# EAGLE board omniphone (EAGLE 9.6.2)
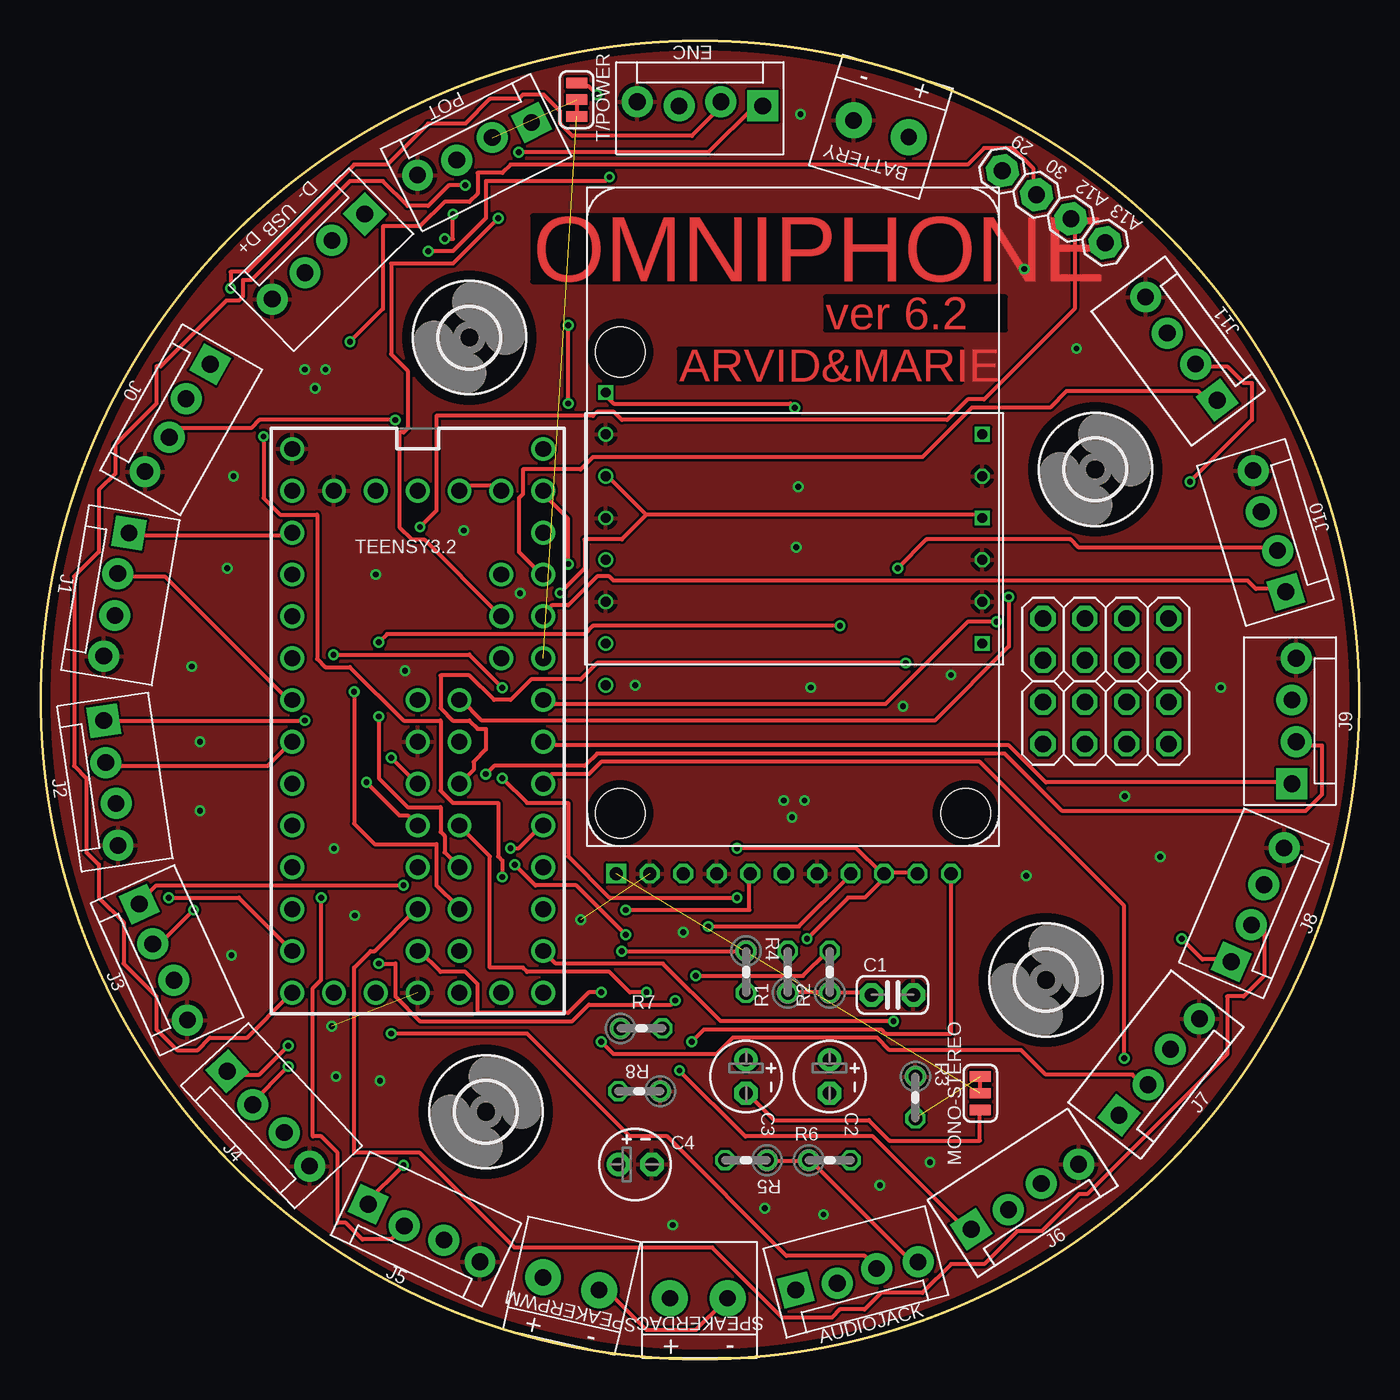
[diagram p0: board, top side]
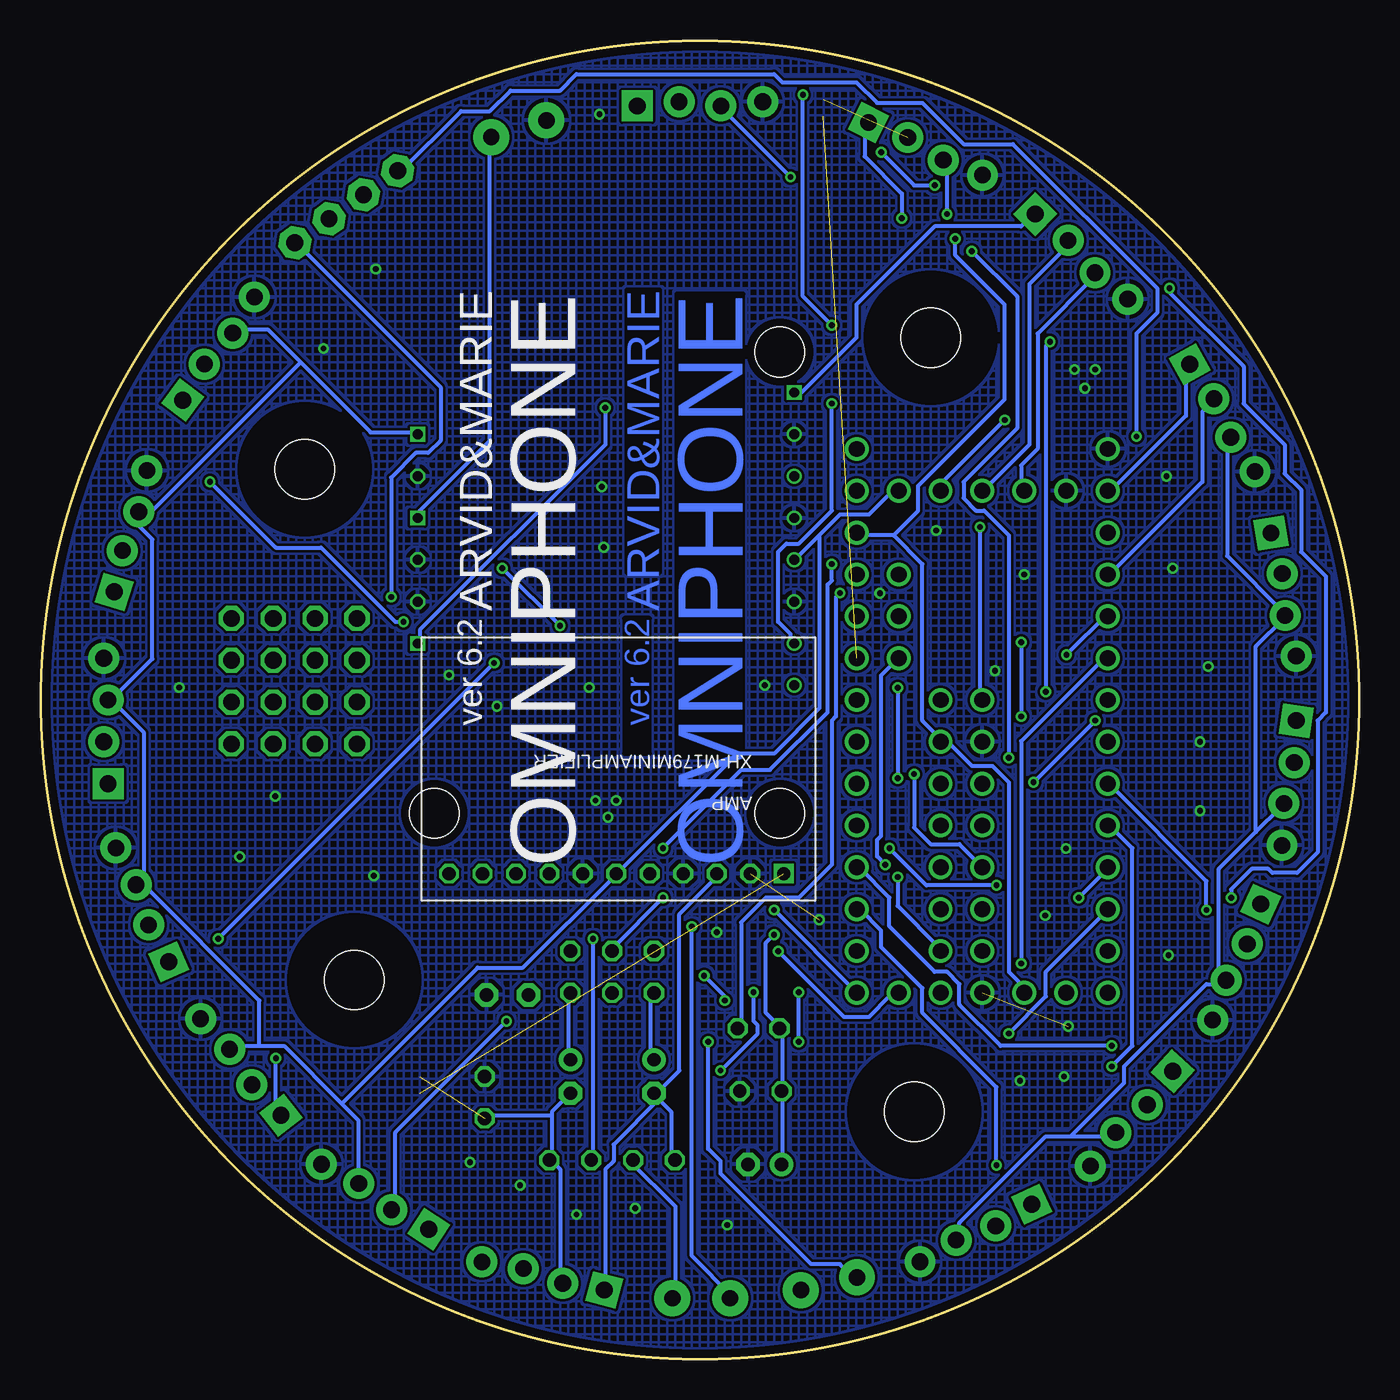
[diagram p1: board, bottom side, seen from below]

Size 80 x 80 mm. Coordinates in mm from the lower left corner, seen from the top.
Outline: circle at 40,40 radius 40
Copper layers (1*16): Top 0.035mm / dielectric 1.6mm / Bottom 0.035mm
Design rules "Elecrow_2-layer_PCB_eagle_rule": minimum track width 6mil, minimum drill 12mil, track to track 6mil, track to pad 6mil, pad to pad 6mil, via to via 8mil, smd to smd 0mil, copper to edge 20mil, drill to drill 10mil, minimum pad ring 6mil, minimum via ring 6mil, stop-mask expansion 0mil, vias tented up to drill 100mil, thermal gap 10mil

## Footprints (pad centres in the part's own frame; a part is rotated, then mirrored left to right if it is on the bottom)
1X01 = drill 1.016 pad 1.93 octagon: 1 0,0
XH-M179AMP = drill 0.8 octagon: 5V 12.065,-1.651; GND 3.937,-1.651; GND1 8.001,-1.651; GND2 14.097,-1.651; L+ 16.129,-1.651; L- 18.161,-1.651; LIN 5.969,-1.651; R+ 22.225,-1.651; R- 20.193,-1.651; SW 10.033,-1.651 | drill 0.8 square: RIN 1.905,-1.651
MOLEX-1X4_LOCK = drill 1.016 pad 1.88 square: 1 0,0.127 | drill 1.016 pad 1.88: 2 2.54,-0.127; 3 5.08,0.127; 4 7.62,-0.127
1X2-3.5MM = drill 1 pad 2.184: + -1.7,0; - 1.8,0
C025-024X044 = drill 0.813 pad 1.422 octagon: 1 -1.27,0; 2 1.27,0
E2-4 = drill 0.813 pad 1.422: + -1.016,0 | drill 0.813 pad 1.422 octagon: - 1.016,0
3,6 = hole 3.6: 0,0
2X04 = drill 1.016 octagon: 1 -3.81,-1.27; 2 -3.81,1.27; 3 -1.27,-1.27; 4 -1.27,1.27; 5 1.27,-1.27; 6 1.27,1.27; 7 3.81,-1.27; 8 3.81,1.27
SMT-JUMPER_3_1-NC_TRACE_SILK = smd 0.635 x 1.27: 1 -1.016,0; 2 0,0; 3 1.016,0
0204V = drill 0.813 octagon: 1 -1.27,0; 2 1.27,0
TEENSY_3.0-3.2_ALL_PINS_&_PADS = drill 0.965: 0 -7.62,13.97; 1 -7.62,11.43; 2 -7.62,8.89; 3 -7.62,6.35; 3.3V 7.62,11.43; 3.3V1 -2.54,-16.51; 3.3V2 2.54,-1.27; 4 -7.62,3.81; 5 -7.62,1.27; 6 -7.62,-1.27; 7 -7.62,-3.81; 8 -7.62,-6.35; 9 -7.62,-8.89; 10 -7.62,-11.43; 11 -7.62,-13.97; 12 -7.62,-16.51; 13 7.62,-16.51; 14/A0 7.62,-13.97; 15/A1 7.62,-11.43; 16/A2 7.62,-8.89; 17/A3 7.62,-6.35; 18/A4 7.62,-3.81; 19/A5 7.62,-1.27; 20/A6 7.62,1.27; 21/A7 7.62,3.81; 22/A8 7.62,6.35; 23/A9 7.62,8.89; 24 0,-3.81; 25 0,-6.35; 26 0,-8.89; 27 0,-11.43; 28 0,-13.97; 29 2.54,-13.97; 30 2.54,-11.43; 31 2.54,-8.89; 32 2.54,-6.35; 33 2.54,-3.81; A10 5.08,6.35; A11 5.08,3.81; A12 0,1.27; A13 2.54,1.27; AGND 7.62,13.97; AREF 5.08,8.89; D+ -2.54,13.97; D- 0,13.97; GND -7.62,16.51; GND1 0,-16.51; GND2 0,-1.27; GND3 -5.08,13.97; PGM 2.54,-16.51; RESET/DAC 5.08,-16.51; VBAT -5.08,-16.51; VIN 7.62,16.51; VUSB 5.08,13.97; VUSB1 2.54,13.97
CHARGECONTROLLERDOUBLE = drill 0.6: 3V3 -22.86,-15.24; 5VOUT1 -22.86,-7.62; BAT1 -22.86,-2.54; EN -22.86,-12.7; GND3 -22.86,0; GND4 -22.86,-5.08; GND5 -22.86,-10.16 | drill 0.6 square: 5VOUT 0,0; BAT 0,-5.08; VIN 0,-12.7; VIN1 -22.86,2.54 | drill 0.6 octagon: GND0 0,-2.54; GND1 0,-7.62; GND2 0,-10.16 | hole 3: -22,-23; -1,-23; -22,5

## Placement (x,y rotation side)
29  [1X01]  58.36,72.13 145 top
30  [1X01]  60.44,70.67 145 top
A12  [1X01]  62.52,69.22 145 top
A13  [1X01]  64.6,67.76 145 top
AMP  XH-M179MINIAMPLIFIER  [XH-M179AMP]  33.02,27.81 180 bottom
AUDIOJACK  [MOLEX-1X4_LOCK]  45.84,4.06 14.8 top
BATTERY  SPEAKERTERMINAL-3.5MM  [1X2-3.5MM]  51.05,74.67 163 top
C1  0.01uF  [C025-024X044]  51.68,22.09 0 top
C2  10uF  [E2-4]  47.87,17.14 270 top
C3  10uF  [E2-4]  42.79,17.14 270 top
C4  0.1uF  [E2-4]  36.06,11.81 0 top
ENC  [MOLEX-1X4_LOCK]  43.81,76.19 180 top
H1  MOUNT-HOLE3.6  [3,6]  27,15 0 top
H2  MOUNT-HOLE3.6  [3,6]  61,23 0 top
H3  MOUNT-HOLE3.6  [3,6]  64,54 0 top
H4  MOUNT-HOLE3.6  [3,6]  26,62 0 top
J0  [MOLEX-1X4_LOCK]  10.16,60.45 240.6 top
J1  [MOLEX-1X4_LOCK]  5.2,50.16 260.4 top
J2  [MOLEX-1X4_LOCK]  3.68,38.73 278.4 top
J3  [MOLEX-1X4_LOCK]  5.84,27.55 294.5 top
J4  [MOLEX-1X4_LOCK]  11.21,17.38 312.8 top
J5  [MOLEX-1X4_LOCK]  19.81,9.27 334.7 top
J6  [MOLEX-1X4_LOCK]  56.53,7.76 33.1 top
J7  [MOLEX-1X4_LOCK]  65.54,14.71 52.1 top
J8  [MOLEX-1X4_LOCK]  72.37,24.06 67 top
J9  [MOLEX-1X4_LOCK]  76.07,34.92 90 top
J10  [MOLEX-1X4_LOCK]  75.69,46.6 107 top
J11  [MOLEX-1X4_LOCK]  71.5,58.28 126.7 top
JP1  PINHD-2X4  [2X04]  64.64,43.68 0 top
JP2  PINHD-2X4  [2X04]  64.64,38.6 0 top
MONO-STEREO  JUMPER-SMT_3_1-NC_TRACE_SILK  [SMT-JUMPER_3_1-NC_TRACE_SILK]  57.02,16.12 90 top
POT  [MOLEX-1X4_LOCK]  29.71,75.18 206.7 top
R1  475R  [0204V]  45.33,23.49 90 top
R2  127K  [0204V]  47.87,23.49 90 top
R3  100k  [0204V]  53.08,15.87 270 top
R4  47-100R  [0204V]  42.79,23.49 270 top
R5  10k  [0204V]  42.79,12.06 180 top
R6  10k  [0204V]  47.87,12.06 0 top
R7  200K  [0204V]  36.44,20.06 0 top
R8  70K  [0204V]  36.32,16.25 180 top
SPEAKERDAC  SPEAKERTERMINAL-3.5MM  [1X2-3.5MM]  39.87,3.68 0 top
SPEAKERPWM  SPEAKERTERMINAL-3.5MM  [1X2-3.5MM]  32.13,4.57 347.2 top
T/POWER  JUMPER-SMT_3_1-NC_TRACE_SILK  [SMT-JUMPER_3_1-NC_TRACE_SILK]  32.51,76.45 270 top
TEENSY3.2  TEENSY_3.1-3.2_ALL_PINS&PADS  [TEENSY_3.0-3.2_ALL_PINS_&_PADS]  22.86,38.73 0 top
U$3  CHARGECONTROLLERDOUBLE  [CHARGECONTROLLERDOUBLE]  57.14,56.13 0 top
USB  [MOLEX-1X4_LOCK]  19.55,69.59 224.5 top

## Library data of the parts
29 30 A12 A13 C1-C4 R1-R8 = adafruit
AMP BATTERY SPEAKERDAC SPEAKERPWM TEENSY3.2 U$3 = ArvidLibrary
AUDIOJACK ENC J0 J1-J11 POT USB = SparkFun-Connectors; PROD_ID: CONN-08186; SF_ID: PRT-08231
H1-H4 = holes
JP1 JP2 = Connector; CATEGORY: CONNECTOR; SUB-CATEGORY: PIN-HEADER
MONO-STEREO T/POWER = SparkFun-Jumpers

## Nets
3.3V: POT.3 TEENSY3.2.3.3V TEENSY3.2.3.3V1 TEENSY3.2.3.3V2
5V: AMP.5V J0.3 J1.3 J2.3 J3.3 J4.3 J5.3 J6.3 J7.3 J8.3 J9.3 J10.3 J11.3 TEENSY3.2.VUSB TEENSY3.2.VUSB1 U$3.5VOUT U$3.5VOUT1
AGND: AMP.L- AMP.R- AUDIOJACK.4 R5.1 R6.1 SPEAKERDAC.- SPEAKERPWM.- TEENSY3.2.AGND
AMPSWITCH: AMP.SW TEENSY3.2.13
AREF: TEENSY3.2.AREF
AUDIODAC: AMP.LIN AUDIOJACK.1 C3.- MONO-STEREO.1 R5.2
AUDIOPWM: AUDIOJACK.2 C2.- MONO-STEREO.3 R3.2 R6.2
BAT: BATTERY.+ R7.2 U$3.BAT U$3.BAT1
BATSENSOR: C4.+ R7.1 R8.2 TEENSY3.2.A11
D+: TEENSY3.2.D+ USB.3
D-: TEENSY3.2.D- USB.2
ENC0: ENC.1 TEENSY3.2.12
ENC1: ENC.2 TEENSY3.2.11
ENCSWITCH: ENC.3 TEENSY3.2.24
GND: AMP.GND AMP.GND1 AMP.GND2 BATTERY.- C1.2 C4.- ENC.4 J0.4 J1.4 J2.4 J3.4 J4.4 J5.4 J6.4 J7.4 J8.4 J9.4 J10.4 J11.4 POT.4 R3.1 R8.1 TEENSY3.2.GND TEENSY3.2.GND1 TEENSY3.2.GND2 TEENSY3.2.GND3 U$3.GND0 U$3.GND1 U$3.GND2 U$3.GND3 U$3.GND4 U$3.GND5 USB.4
JACKSENSOR: AUDIOJACK.3 TEENSY3.2.10
L+: AMP.L+ SPEAKERDAC.+
LED0: J0.2 TEENSY3.2.2
LED1: J1.2 TEENSY3.2.5
LED2: J2.2 TEENSY3.2.6
LED3: J3.2 TEENSY3.2.7
LED4: J4.2 TEENSY3.2.8
LED5: J5.2 TEENSY3.2.9
LED6: J6.2 TEENSY3.2.14/A0
LED7: J7.2 TEENSY3.2.28
LED8: J8.2 TEENSY3.2.27
LED9: J9.2 TEENSY3.2.26
LED10: J10.2 TEENSY3.2.31
LED11: J11.2 TEENSY3.2.20/A6
N$1: C1.1 C2.+ R1.1 R2.1
N$2: A13.1 TEENSY3.2.A13
N$3: A12.1 TEENSY3.2.A12
N$4: POT.2 T/POWER.2
N$5: R4.1 TEENSY3.2.RESET/DAC
N$6: 30.1 TEENSY3.2.30
N$7: C3.+ R4.2
N$8: 29.1 TEENSY3.2.29
POT: POT.1 TEENSY3.2.A10
POTSWITCH: T/POWER.3 TEENSY3.2.21/A7
POWERENABLE: T/POWER.1 U$3.EN
PWMAUDIO0: R2.2 TEENSY3.2.4
PWMAUDIO1: R1.2 TEENSY3.2.3
R+: AMP.R+ SPEAKERPWM.+
RIN: AMP.RIN MONO-STEREO.2
TOUCH0: J0.1 TEENSY3.2.0
TOUCH1: J1.1 TEENSY3.2.1
TOUCH2: J2.1 TEENSY3.2.25
TOUCH3: J3.1 TEENSY3.2.17/A3
TOUCH4: J4.1 TEENSY3.2.16/A2
TOUCH5: J5.1 TEENSY3.2.15/A1
TOUCH6: J6.1 TEENSY3.2.32
TOUCH7: J7.1 TEENSY3.2.18/A4
TOUCH8: J8.1 TEENSY3.2.33
TOUCH9: J9.1 TEENSY3.2.19/A5
TOUCH10: J10.1 TEENSY3.2.22/A8
TOUCH11: J11.1 TEENSY3.2.23/A9
VBAT: TEENSY3.2.VBAT
VIN: TEENSY3.2.VIN
VUSBIN: U$3.VIN U$3.VIN1 USB.1

## Tracks (layer width: path | path; a pad name or v marks a point on that pad's centre or on a via)
3.3V  (via drill 0.35)
  Top 0.254: v25,69.5 25,68 v24.5,68
  Bottom 0.254: TEENSY3.2.3.3V1 20.5,22.25 20.5,22.75 21.25,23.5 21.25,35 22.25,36 23.5,36 24.75,37.25 25.25,37.25 TEENSY3.2.3.3V2 25.25,37.5 26.5,38.75 26.5,48.25 28.25,50 | 28.25,50 30.25,50 TEENSY3.2.3.3V | v25,69.5 25,72.75 POT.3 | v24.5,68 24.5,67 21.5,64 21.5,58.25 26.75,53 26.75,51.5 28.25,50
5V  (via drill 0.35)
  Top 0.254: TEENSY3.2.VUSB1 25.5,52.75 25.75,53 27.5,53 27.75,52.75 TEENSY3.2.VUSB | v21.5,57 13.25,57 12.75,56.5 8.5,56.5 8,56 J0.3
  Bottom 0.254: J0.3 8,55.75 8,48.75 4.5,45.25 J1.3 4.5,45 6.25,43.25 6.25,32 | 17.5,13.5 19,13.5 24.25,8.25 24.25,7.25 J5.3 | 17.5,13.5 15,13.5 J4.3 | 8.5,22.75 9.25,22.75 14.25,17.75 14.25,16.75 17.5,13.5 | 8.5,22.75 8.25,22.75 J3.3 8.5,22.75 | 6.25,32 8.5,29.75 8.5,22.75 | 6.25,32 4.75,33.5 J2.3 | 32.75,50 31.5,51.25 29.75,51.25 28.5,52.5 28,52.5 TEENSY3.2.VUSB | 32.75,50 34,48.75 34.25,48.75 U$3.5VOUT1 | 32.75,50 32.75,39.5 35.5,36.75 37.75,36.75 45,29.5 AMP.5V 45.25,29.25 50.75,23.75 53.5,23.75 61.75,15.5 | 64.25,60.5 66.25,62.5 68.25,62.5 J11.3 | 64.25,60.5 60,56.25 57.25,56.25 U$3.5VOUT | 64.25,60.5 73.25,51.5 74,51.5 J10.3 74,51.25 74,50.5 73.25,49.75 73.25,42.5 75.75,40 | 61.75,15.5 65.25,19 66.75,19 | 61.75,15.5 60.75,14.5 60.75,10.75 J6.3 | 66.75,19 68.5,19 J7.3 | 73.75,28.75 74,28.75 J8.3 73.75,28.75 | 73.75,28.75 66.75,21.75 66.75,19 | 75.75,40 73.75,38 73.75,28.75 | 75.75,40 J9.3 | v21.5,57 25.25,53.25 25.25,52.75 TEENSY3.2.VUSB1
AGND  (via drill 0.35)
  Top 0.254: SPEAKERDAC.- 41.5,3.5 39.75,1.75 36.75,1.75 34.5,4 34,4 SPEAKERPWM.- | R5.1 44.25,12 46.5,12 R6.1 46.75,12 52.75,6 53,6 AUDIOJACK.4 | AMP.L- 51.25,29.5 53,29.5 AMP.R- | v32,48.25 32,51 30.5,52.5 TEENSY3.2.AGND | v42.25,31 49.5,31 51,29.5 AMP.L- | v46.5,25.5 49,28 50,28 51.25,29.25 AMP.L-
  Bottom 0.254: SPEAKERDAC.- 41.5,3.75 41.5,9.25 44.25,12 R5.1 | v32,48.25 32,47.25 32.25,47 32.25,39.25 35.75,35.75 37.5,35.75 v42.25,31 | v46.5,25.5 46.5,12.25 R6.1
AMPSWITCH  (via drill 0.35)
  Top 0.254: v35.5,27.25 43,27.25 43,29.25 AMP.SW
  Bottom 0.254: v35.5,27.25 30.5,22.25 TEENSY3.2.13
AUDIODAC
  Top 0.254: MONO-STEREO.1 57,15 57,13.25 51.5,13.25 50.25,14.5 44.5,14.5 43,16 C3.-
  Bottom 0.254: 42.75,16 41.25,17.5 41.25,27 39,29.25 AMP.LIN | 42.75,16 42.5,15.75 | 42.5,15.75 41.75,15 41.75,12.25 R5.2 | 42.75,16 C3.- 42.5,15.75 | 42.5,15.75 45.25,13 45.25,12 45.75,11.5 45.75,4.25 AUDIOJACK.1
AUDIOPWM  (1 unrouted)
  Bottom 0.254: 49,14.75 49,15 48,16 C2.- | 49,14.75 49,12.25 R6.2 49,12 48.5,11.5 48.5,4.75 AUDIOJACK.2 | 49,14.75 53,14.75 R3.2
BAT  (via drill 0.35)
  Top 0.254: 36.75,51.25 34.5,53.5 U$3.BAT1 | 36.75,51.25 57,51.25 U$3.BAT | v31.5,46.5 33,48 33,49.75 35.25,49.75 36.75,51.25
  Bottom 0.254: v31.5,46.5 31.75,46.25 31.75,39 32,38.75 32,30 34,28 36,28 37.5,26.5 37.5,20.25 R7.2 | BATTERY.+ 52.75,74 52.75,55.75 57.25,51.25 U$3.BAT
BATSENSOR  (via drill 0.35)
  Top 0.254: v28.75,30 30,28.75 32.5,28.75 v35.5,25.75
  Bottom 0.254: C4.+ 35,12 35,16.25 R8.2 35,16.5 35,20 R7.1 35.25,20.25 36,21 36,25.25 v35.5,25.75 | v28.75,30 29.25,30.5 29.25,31.5 29,31.75 29,41.5 28,42.5 TEENSY3.2.A11
D+
  Bottom 0.254: TEENSY3.2.D+ 20.5,52.75 20.5,54.25 19.5,55.25 19.5,62.25 16,65.75 USB.3
D-
  Bottom 0.254: TEENSY3.2.D- 22.75,52.75 20,55.5 20,65.25 17.5,67.75 USB.2
ENC0  (via drill 0.35)
  Top 0.254: v25.75,71.25 24.75,71.25 23.5,70 22.25,70 20.75,71.5 18.75,71.5 12.75,65.5 12.25,65.5 12.25,64.5 12,64.25 11.25,64.25 7.25,60.25 7,60.25 7,58 4.5,55.5 4.5,53.75 3.5,52.75 3.5,49 2,47.5 2,36 2.75,35.25 2.75,30.75 3.5,30 3.5,28 5,26.5 5,24 7,22 7,20 8.25,18.75 9.5,18.75 10.25,19.5 12.5,19.5 15,22 TEENSY3.2.12 | v29,73.25 40.5,73.25 43.25,76 43.75,76 ENC.1
  Bottom 0.254: v25.75,71.25 27,71.25 v29,73.25
ENC1  (via drill 0.35)
  Top 0.254: v7.75,28 12,28 15,25 TEENSY3.2.11 | v11.5,65 11.5,66 12.5,66 19,72.5 21,72.5 23.5,75 25.75,75 27.25,76.5 29,76.5 29.25,76.75 30.5,76.75 31.5,75.75 31.5,75 32.25,74.25 39.5,74.25 41.5,76.25 ENC.2
  Bottom 0.254: v7.75,28 7.75,28.5 6.5,29.75 5.5,29.75 5.25,29.5 3.75,29.5 2.5,30.75 2.5,38.75 2,39.25 2,47.5 3.5,49 3.5,52.75 4.5,53.75 4.5,55.5 7,58 7,60.25 11.5,64.75 v11.5,65
ENCSWITCH  (via drill 0.35)
  Top 0.254: v21.25,36.5 22.75,35 TEENSY3.2.24 | v23.5,67.25 25,67.25 27,69.25 27,71.5 34.25,71.5 v34.5,71.75
  Bottom 0.254: v21.25,36.5 21.25,50 22.75,51.5 23.25,51.5 24,52.25 24,53.25 20.75,56.5 20.75,64.5 v23.5,67.25 | v34.5,71.75 38.75,76 ENC.3
GND  (via drill 0.35)  (2 unrouted)
  other vias: 16.63,58.92 16,60.07 17.27,60.07 20.32,47.62 25.65,50.29 29.08,46.48 36.06,40.89 46.73,40.76 45.08,33.9 46.35,33.9 45.59,32.89 65.78,34.16 67.94,30.48 59.81,29.33 71.62,40.76 17.9,17.14 20.57,16.89 17.65,20.19 19.05,26.92 17.77,30.98 9.65,33.27 11.55,24.51 38.98,25.9 32.76,26.66 22.09,41.78 9.65,37.46 9.14,42.03 11.3,48 11.68,53.59 46.1,75.56 59.69,66.16 62.86,61.34 45.97,52.95 45.84,49.27 55.24,41.52 52.32,39.62 53.97,11.93 50.92,10.54 47.49,8.76 43.94,9.14 38.35,8.12
  pour Top: 40,83.18 60.32,83.18 83.18,60.32 83.18,22.22 57.78,-3.18 22.22,-3.18 -5.72,24.76 -5.72,57.78 17.14,80.64 19.68,83.18
  pour Bottom (hatched): 40,83.18 19.68,83.18 -3.18,60.32 -3.18,22.22 22.22,-3.18 57.78,-3.18 85.72,24.76 85.72,57.78 62.86,80.64 60.32,83.18
JACKSENSOR  (via drill 0.35)
  Top 0.254: v21.25,19.75 29.5,19.75 35.75,13.5 38,13.5 45.25,6.25 50,6.25 50.75,5.5 AUDIOJACK.3
  Bottom 0.254: v21.25,19.75 19,22 19,23.5 15.25,27.25 TEENSY3.2.10
L+  (via drill 0.35)
  Top 0.254: v40.5,26.25 46,26.25 49,29.25 AMP.L+
  Bottom 0.254: v40.5,26.25 40.5,6.25 38,3.75 SPEAKERDAC.+
LED0
  Bottom 0.254: TEENSY3.2.2 15,47.75 9.5,53.25 9.5,57.5 8.75,58.25 J0.2
LED1
  Top 0.254: TEENSY3.2.5 15,40 7.5,47.5 4.75,47.5 J1.2
LED2
  Top 0.254: TEENSY3.2.6 15,37.25 13.75,36 4,36 J2.2
LED3  (via drill 0.35)
  Top 0.254: v9.25,27.25 7.25,25.25 7,25.25 J3.2
  Bottom 0.254: v9.25,27.25 9.25,29 15,34.75 TEENSY3.2.7
LED4  (via drill 0.35)
  Top 0.254: v15,17.75 12.75,15.5 J4.2
  Bottom 0.254: v15,17.75 13.75,19 13.75,31 15,32.25 TEENSY3.2.8
LED5  (via drill 0.35)
  Top 0.254: v17,28 17,23 16.5,22.5 16.5,13.5 17,13.5 18,12.5 18,8.25 18.5,8.25 19.5,7.25 21.25,7.25 22,8 J5.2
  Bottom 0.254: v17,28 15.25,29.75 TEENSY3.2.9
LED6  (via drill 0.35)
  Top 0.254: v51.75,20.5 41.25,20.5 37.75,24 31.25,24 30.5,24.75 TEENSY3.2.14/A0
  Bottom 0.254: v51.75,20.5 58.5,13.75 58.5,9.25 J6.2
LED7  (via drill 0.35)
  Top 0.254: v34,22.25 33.25,22.25 32,21 26.5,21 26.5,22.75 25.75,23.5 24.25,23.5 23,24.75 TEENSY3.2.28 | v34,19.25 34.75,18.5 41,18.5 42,19.5 50.75,19.5 51.5,18.75 59.5,18.75 61,17.25 66.25,17.25 66.75,16.75 67,16.75 J7.2
  Bottom 0.254: v34,19.25 v34,22.25
LED8
  Top 0.254: TEENSY3.2.27 22.75,27.25 20.25,24.75 20,24.75 19,23.75 19,12.5 23,12.5 28.75,6.75 40.75,6.75 45,2.5 48,2.5 48.5,3 50,3 51,4 53.5,4 55.25,5.75 57.25,5.75 59.25,7.75 60.75,7.75 63,10 63.5,10 72,18.5 72,22 73,22 74.25,23.25 74.25,26.25 73.5,26.25 J8.2
LED9  (via drill 0.35)
  Top 0.254: v27,35.5 27.5,36 33,36 33.75,36.75 58.5,36.75 62,33.25 76.75,33.25 77.75,34.25 77.75,37.25 76.25,37.25 J9.2
  Bottom 0.254: v27,35.5 27,32.25 26,31.25 24.25,31.25 23,30 TEENSY3.2.26
LED10  (via drill 0.35)
  Top 0.254: v20.5,39 20.5,35.25 22.25,33.5 24.25,33.5 24.25,32 24.5,31.75 24.5,30.75 25.25,30 TEENSY3.2.31 | v20.5,43.5 21,44 33,44 33.5,44.5 v48.5,44.5 | v52,48 53.75,49.75 62.5,49.75 63,49.25 75,49.25 J10.2
  Bottom 0.254: v20.5,43.5 v20.5,39 | v52,48 v48.5,44.5
LED11  (via drill 0.35)
  Top 0.254: v58,44.75 56.25,44.75 51.25,39.75 30.75,39.75 30.5,40 TEENSY3.2.20/A6 | v69.75,53.25 73.5,57 73.5,59.25 73,59.25 72,60.25 70.25,60.25 J11.2
  Bottom 0.254: v58,44.75 58.5,44.75 63,49.25 65.75,49.25 v69.75,53.25
N$1
  Top 0.254: R1.1 45.5,22.25 47.75,22.25 R2.1 48,22.25 50.25,22.25 C1.1
  Bottom 0.254: C2.+ 48,18.25 48,22 R2.1
N$2  (via drill 0.35)
  Top 0.254: v58.75,46.25 58.75,43.25 54.25,38.75 26.75,38.75 25.5,40 TEENSY3.2.A13
  Bottom 0.254: v58.75,46.25 58.75,53.5 57.25,55 56.5,55 55.75,55.75 55.75,59 64.5,67.75 A13.1
N$3  (via drill 0.35)
  Top 0.254: v23,50.5 24,51.5 24,57.25 33.5,57.25 33.75,57.5 34.75,57.5 35.25,57 55,57 56.25,58.25 57.25,58.25 62.75,63.75 62.75,69 A12.1
  Bottom 0.254: v23,50.5 23,40 TEENSY3.2.A12
N$4  (1 unrouted)
N$5  (via drill 0.35)
  Top 0.254: v35.25,24.75 42.75,24.75 R4.1
  Bottom 0.254: v35.25,24.75 31.25,20.75 29.75,20.75 28.5,22 28,22 TEENSY3.2.RESET/DAC
N$6  (via drill 0.35)
  Top 0.254: v19,40.5 19,32.5 20.25,31.25 24,31.25 24,28.75 25.25,27.5 TEENSY3.2.30 | v18.75,61.75 20.75,63.75 20.75,68.75 23,68.75 24.5,70.25 26,70.25 26.5,70.75 26.5,72 28,72 28.5,72.5 56.25,72.5 57.25,73.5 59,73.5 60.25,72.25 60.25,70.75 30.1
  Bottom 0.254: v19,40.5 19,61.5 v18.75,61.75
N$7
  Bottom 0.254: R4.2 43,22 43,18.25 C3.+
N$8  (via drill 0.35)
  Top 0.254: v28,29.25 28,30.25 27.75,30.5 27.75,33.75 25,33.75 24.25,34.5 24.25,38.75 22,38.75 18.75,42 17.25,42 16.75,42.5 16.75,51.25 14.5,51.25 13.5,52.25 v13.5,56
  Bottom 0.254: v28,29.25 28,27.5 25.5,25 TEENSY3.2.29 | v13.5,56 13.5,62.25 12.25,63.5 12.25,65 21,73.75 24,73.75 26.5,76.25 29.25,76.25 30.5,77.5 35,77.5 35.5,78 47.5,78 48.5,77 51.5,77 52.75,75.75 54.5,75.75 58.25,72 29.1
POT  (via drill 0.35)
  Top 0.254: v27.75,69.25 25,66.5 21.25,66.5 21.25,61 22.25,60 22.25,56.5 22,56.25 21.75,56.25 21.75,50.5 22.5,49.75 23.25,49.75 27.75,45.25 TEENSY3.2.A10
  Bottom 0.254: v27.75,69.25 27.75,70.75 30,73 30,75 POT.1
POTSWITCH  (1 unrouted)
POWERENABLE  (via drill 0.35)
  Top 0.254: v33.75,76.75 33.25,77.25 32.75,77.25 T/POWER.1 | v32,58 v32,62.75
  Bottom 0.254: v33.75,76.75 33.75,64.5 v32,62.75 | v32,58 32,51.5 34,49.5 34.75,49.5 35.25,49 35.25,44.75 34.5,44 34.5,43.5 U$3.EN
PWMAUDIO0  (via drill 0.35)
  Top 0.254: v39.75,23.25 46.25,23.25 47.75,24.75 R2.2 | v38.5,21.75 38.25,21.5 33.25,21.5 32.25,20.5 23,20.5 21.5,22 21.5,24 v20.5,24
  Bottom 0.254: v39.75,23.25 38.5,22 v38.5,21.75 | v20.5,24 20.5,37.5 15.25,42.75 TEENSY3.2.4
PWMAUDIO1  (via drill 0.35)
  Top 0.254: v42.25,28 34.5,28 32,30.5 32,33.75 29.5,33.75 v28,35.25 | v28,40.75 26,42.75 v17.75,42.75
  Bottom 0.254: v42.25,28 45.25,25 R1.2 | v28,40.75 v28,35.25 | v17.75,42.75 15.25,45.25 TEENSY3.2.3
R+  (via drill 0.35)
  Top 0.254: v39.5,19.25 40.25,20 51,20 51.25,19.75 55.25,19.75 55.25,29.25 AMP.R+
  Bottom 0.254: v39.5,19.25 39.5,12.75 38.75,12 38.75,11.25 33.25,5.75 31.5,5.75 30.5,4.75 SPEAKERPWM.+
RIN  (1 unrouted)
TOUCH0
  Bottom 0.254: TEENSY3.2.0 15,52.75 10.5,57.25 10.5,60.25 J0.1
TOUCH1
  Top 0.254: TEENSY3.2.1 15,50 5.5,50 J1.1
TOUCH2  (via drill 0.35)
  Top 0.254: v19.75,35 21.75,33 22.25,33 22.75,32.5 TEENSY3.2.25 | v16,38.75 4,38.75 J2.1
  Bottom 0.254: v16,38.75 v19.75,35
TOUCH3  (via drill 0.35)
  Top 0.254: v28.5,31 29,31 30.25,32.25 TEENSY3.2.17/A3 | v22,28.75 7,28.75 6,27.75 J3.1
  Bottom 0.254: v28.5,31 26.25,28.75 v22,28.75
TOUCH4  (via drill 0.35)
  Top 0.254: v15,19 13.25,17.25 11.5,17.25 J4.1
  Bottom 0.254: v15,19 21.75,19 24.25,21.5 24.25,22.75 25,23.5 25.75,23.5 28.5,26.25 28.5,28 30.25,29.75 TEENSY3.2.16/A2
TOUCH5  (via drill 0.35)
  Top 0.254: v22,11.75 19.75,9.5 J5.1
  Bottom 0.254: v22,11.75 22,16.5 26.5,21 26.5,22.5 29,25 29,26 30.25,27.25 TEENSY3.2.15/A1
TOUCH6  (via drill 0.35)
  Top 0.254: v36.75,22.25 35.75,22.25 34.5,23.5 29.5,23.5 29.25,23.75 27.25,23.75 27.25,30.5 25.5,32.25 TEENSY3.2.32 | v38.75,17.5 42.75,13.5 50.5,13.5 56,8 56.25,8 J6.1
  Bottom 0.254: v36.75,22.25 36.75,20.5 36.5,20.25 36.5,19.75 v38.75,17.5
TOUCH7  (via drill 0.35)
  Top 0.254: v65.75,18.25 65.75,27.5 57,36.25 34,36.25 33.25,35.5 31,35.5 30.5,35 TEENSY3.2.18/A4
  Bottom 0.254: v65.75,18.25 65.75,15.25 65.5,15 J7.1
TOUCH8  (via drill 0.35)
  Top 0.254: v52.5,42.25 33.75,42.25 32.75,41.25 29.75,41.25 28.5,40 27.5,40 26,41.5 24.25,41.5 24.25,39.5 25,38.75 26,38.75 26.5,38.25 27,38.25 27,37 26.25,36.25 26.25,35.75 25.5,35 TEENSY3.2.33 | v69.25,25.5 70.5,24.25 72.25,24.25 J8.1
  Bottom 0.254: v69.25,25.5 v52.5,42.25
TOUCH9
  Top 0.254: TEENSY3.2.19/A5 30.5,37.25 58.75,37.25 61,35 75.75,35 J9.1
TOUCH10
  Top 0.254: TEENSY3.2.22/A8 30.5,45.25 31,45.75 32,45.75 33.75,47.5 34.5,47.5 34.75,47.25 73.25,47.25 73.75,46.75 75.5,46.75 J10.1
TOUCH11
  Top 0.254: TEENSY3.2.23/A9 30.25,47.75 29,49 29,52.25 29.25,52.5 29.25,54 32.75,54 33.5,54.75 53.5,54.75 56.5,57.75 61.25,57.75 62.25,58.75 70.25,58.75 70.75,58.25 71.25,58.25 J11.1
VUSBIN  (via drill 0.35)
  Top 0.254: v45.75,57.75 45.5,58 34.75,58 34.25,58.5 U$3.VIN1
  Bottom 0.254: U$3.VIN1 34.25,58.5 34,58.5 30.5,62 30.5,64 25.75,68.75 20.5,68.75 19.75,69.5 USB.1 | v45.75,57.75 45.75,55.5 57,44.25 57,43.5 U$3.VIN

## Text on the board
Top: OMNIPHONE | ver 6.2 | ARVID&MARIE
Bottom: OMNIPHONE | ARVID&MARIE | ver 6.2
tPlace: D- | D+
bPlace: OMNIPHONE | ARVID&MARIE | ver 6.2